# EAGLE board DiscoveryConnector_V1_1 (EAGLE 9.6.2)
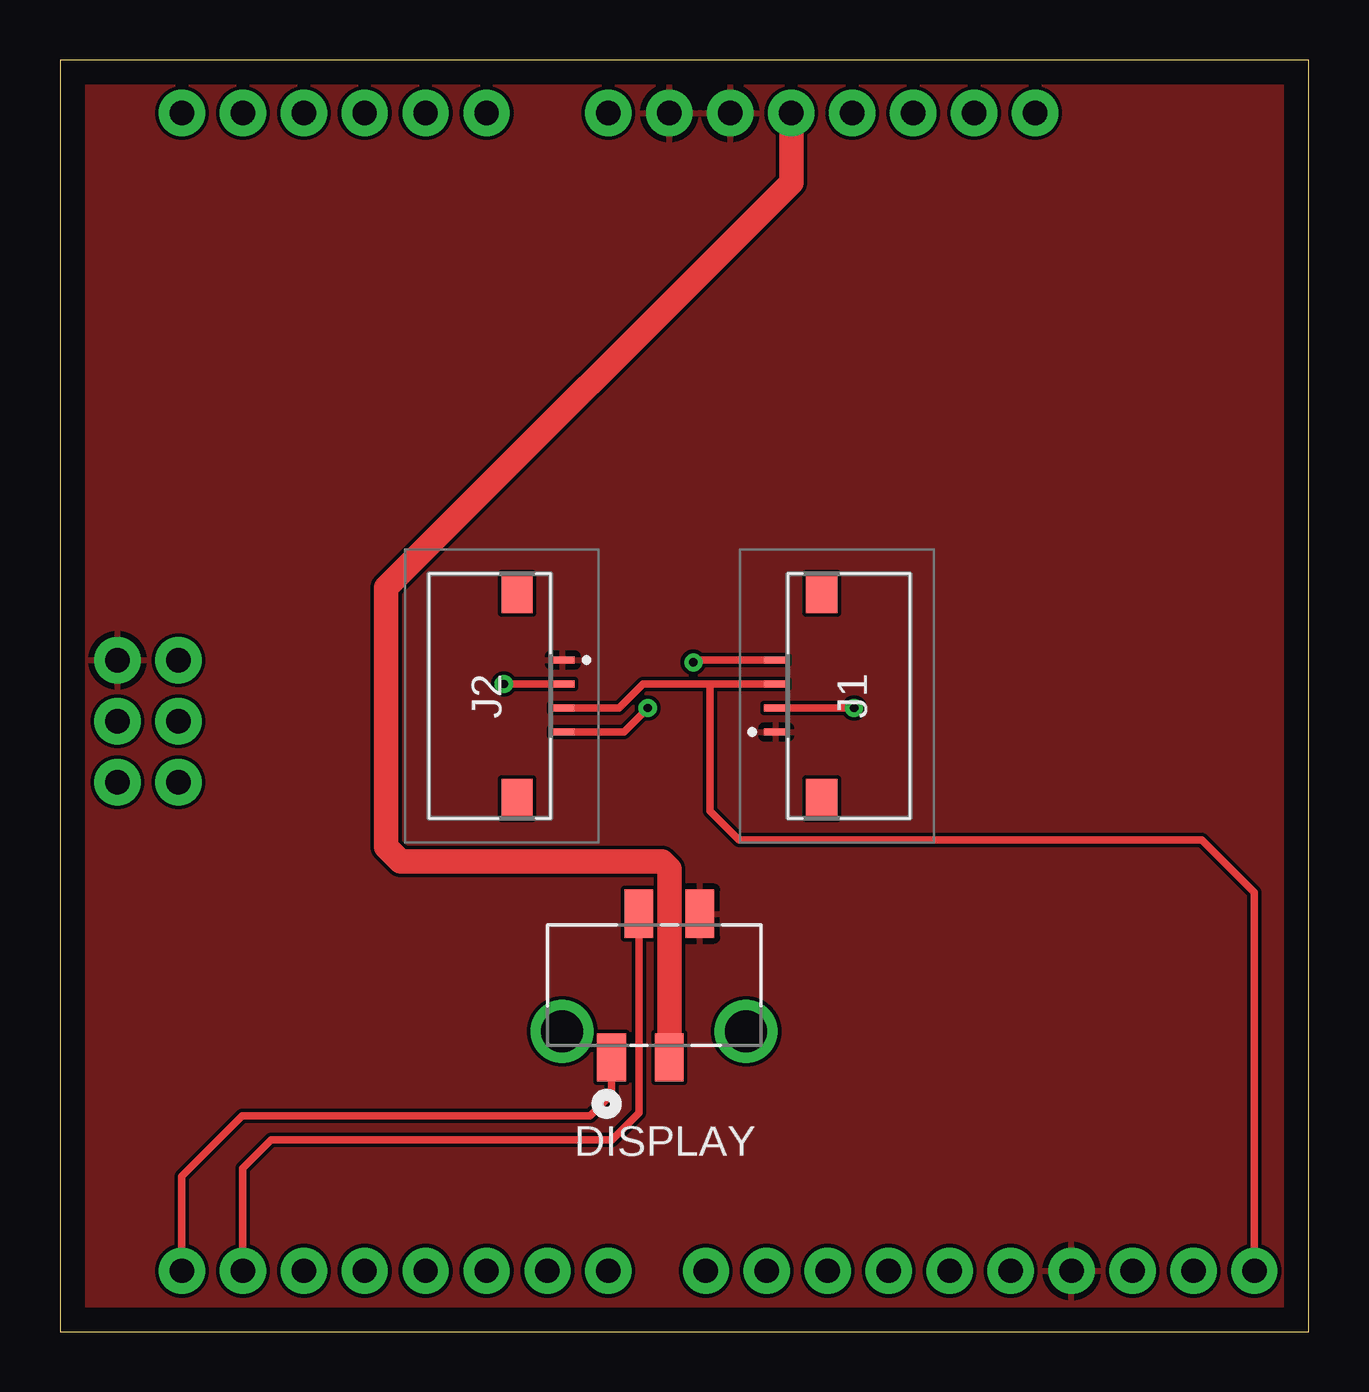
[diagram p0: board, top side]
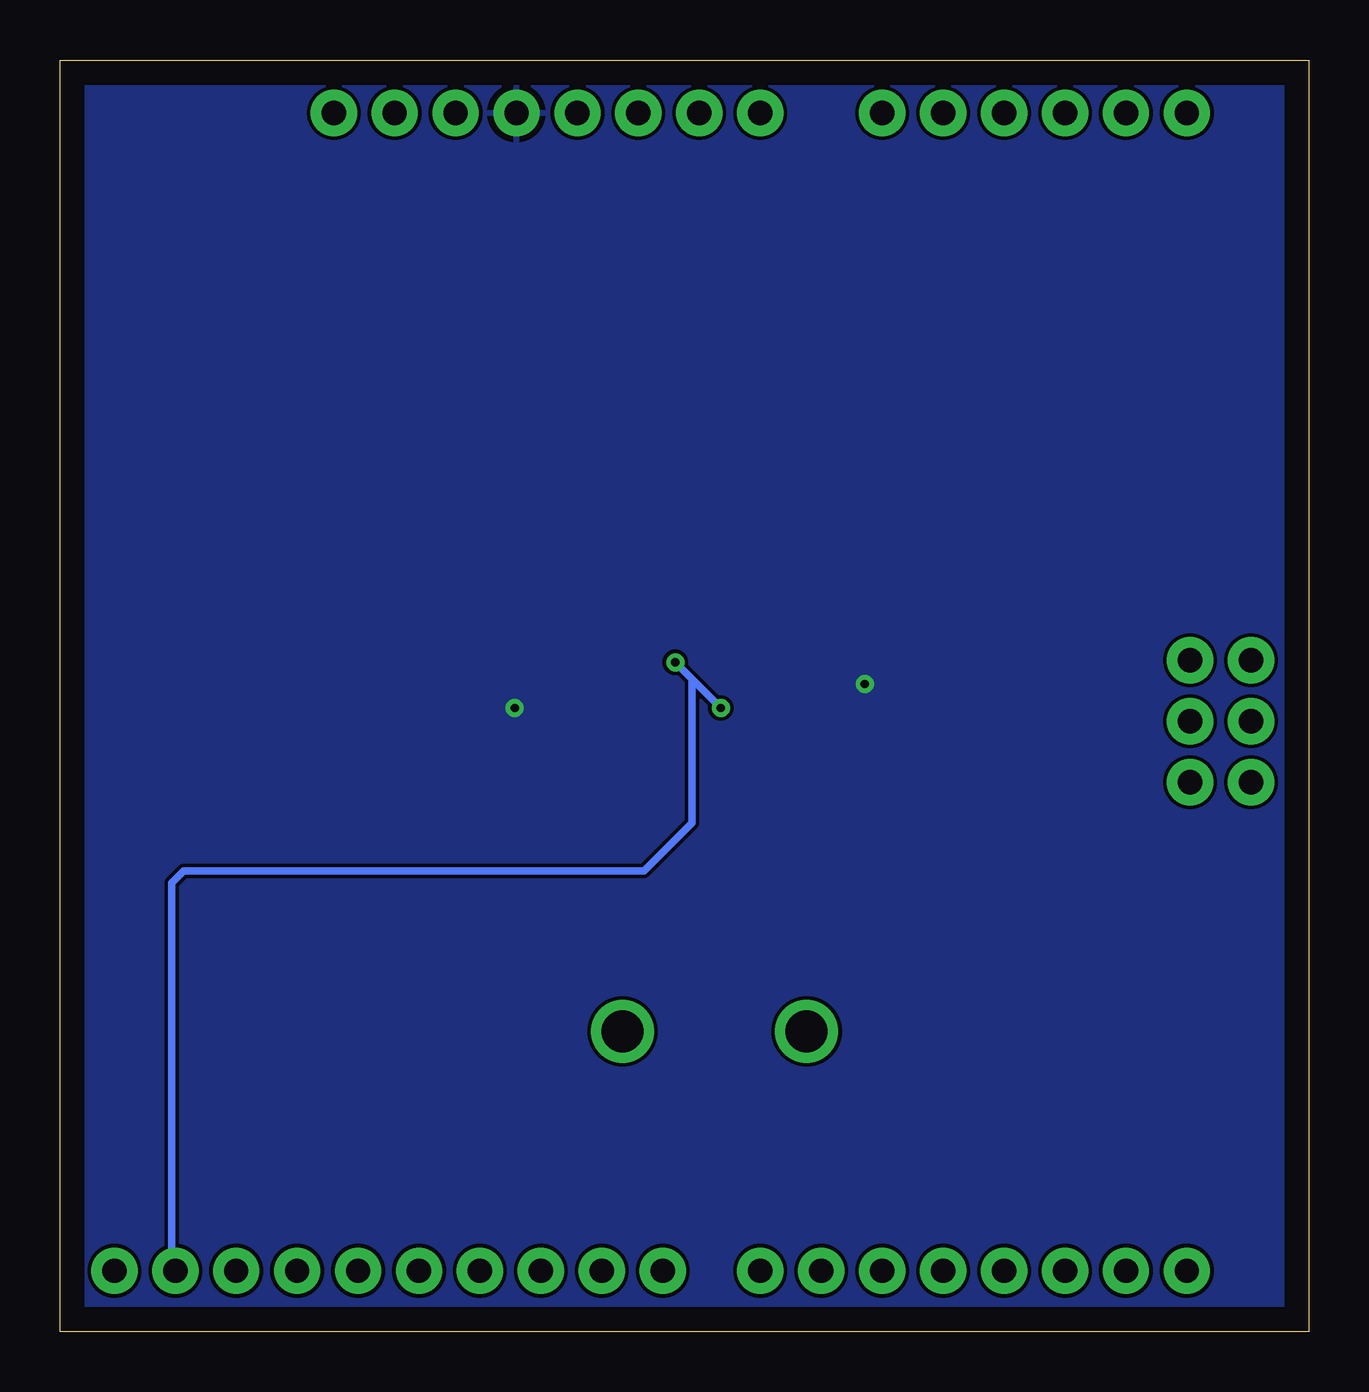
[diagram p1: board, bottom side, seen from below]

Size 52.05 x 53.01 mm. Coordinates in mm from the lower left corner, seen from the top.
Outline: 0,0 52.05,0 52.05,53.01 0,53.01 0,0
Copper layers (1*16): Top 0.035mm / dielectric 1.5mm / Bottom 0.035mm
Design rules "default *": minimum track width 6mil, minimum drill 0.35mm, track to track 6mil, track to pad 6mil, pad to pad 5mil, via to via 6mil, smd to smd 6mil, copper to edge 40mil, drill to drill 6mil, minimum pad ring 10mil, minimum via ring 8mil, stop-mask expansion 4mil, vias tented up to drill 0mil, thermal gap 10mil

## Footprints (pad centres in the part's own frame; a part is rotated, then mirrored left to right if it is on the bottom)
ARDUINO_R3 = drill 1.016 pad 1.93: 3.3V 2.54,-24.13; 5V 5.08,-24.13; A0 17.78,-24.13; A1 20.32,-24.13; A2 22.86,-24.13; A3 25.4,-24.13; A4 27.94,-24.13; A5 30.48,-24.13; AREF -9.144,24.13; D0 30.48,24.13; D1 27.94,24.13; D2 25.4,24.13; D3 22.86,24.13; D4 20.32,24.13; D5 17.78,24.13; D6 15.24,24.13; D7 12.7,24.13; D8 8.636,24.13; D9 6.096,24.13; D10 3.556,24.13; D11 1.016,24.13; D12 -1.524,24.13; D13 -4.064,24.13; GND@1 7.62,-24.13; GND@2 10.16,-24.13; GND@3 -6.604,24.13; GND@4 33.16,-1.32; IOREF -2.54,-24.13; MISO 30.62,3.76; MOSI 33.16,1.22; NC -5.08,-24.13; RESET@1 0,-24.13; RESET@2 30.62,-1.32; SCK 30.62,1.22; SCL -14.224,24.13; SDA -11.684,24.13; VCC 33.16,3.76; VIN 12.7,-24.13
MOLEX_90814-0204 = smd 1.194 x 2.007: 1 0.127,0; 2 1.27,5.994; 3 2.54,0; 4 3.81,5.994 | drill 1.753 pad 2.629: 5 -1.93,1.092; 6 5.74,1.092
686104183422 = smd 0.3 x 1: 1 -1.5,1.9; 2 -0.5,1.9; 3 0.5,1.9; 4 1.5,1.9 | smd 1.65 x 1.3: 5 -4.275,0; 6 4.275,0

## Placement (x,y rotation side)
B1  ARDUINO_UNO_R3  [ARDUINO_R3]  35.56,26.67 180 top
DISPLAY  90814-0204  [MOLEX_90814-0204]  22.86,11.43 0 top
J1  686104183422  [686104183422]  31.75,26.5 90 top
J2  686104183422  [686104183422]  19.05,26.5 270 top

## Library data of the parts
B1 = electro_mechanical
DISPLAY = electro_mechanical; DESCRIPTION: CONN HEADER 4POS 1.27MM SMD TIN; HEIGHT: mm; MANUFACTURER_NAME: Molex; MANUFACTURER_PART_NUMBER: 90814-0204; MOUSER_PART_NUMBER: 538-90814-0204; MOUSER_PRICE-STOCK: https://www.mouser.com/Search/Refine.aspx?Keyword=538-90814-0204
J1 J2 = electro_mechanical; DESCRIPTION: Wurth Elektronik WR-FPC Series 1mm Pitch 4 Way Horizontal SMT Female FPC Connector, Top Contact; HEIGHT: 1.3mm; MANUFACTURER_NAME: Wurth Elektronik; MANUFACTURER_PART_NUMBER: 686104183422; MOUSER_PART_NUMBER: 710-686104183422; MOUSER_PRICE-STOCK: https://www.mouser.com/Search/Refine.aspx?Keyword=710-686104183422

## Nets
3V3: B1.3.3V J1.2 J2.2
GND: B1.GND@1 B1.GND@2 B1.GND@3 B1.GND@4 DISPLAY.4 J1.1 J2.1
N$1: B1.5V DISPLAY.3
SCL: B1.SCL J1.3 J2.3
SDA: B1.SDA J1.4 J2.4
USART6_RX: B1.D1 DISPLAY.2
USART6_TX: B1.D0 DISPLAY.1

## Tracks (layer width: path | path; a pad name or v marks a point on that pad's centre or on a via)
3V3  (via drill 0.35)
  Top 0.305: J2.2 v18.5,27 | J1.2 v33.1,26
  pour Bottom: -1.67,53.34 -1.67,-1.27 53.34,-1.27 53.34,53.34
GND
  pour Top: -1.27,53.34 -1.27,-1.27 53.34,-1.27 53.34,53.34
N$1
  Top 1.016: B1.5V 30.48,47.9 13.6,31.02 13.6,20.2 14.2,19.6 25.1,19.6 25.4,19.3 DISPLAY.3
SCL
  Top 0.305: J1.3 27.1,27 | 27.1,27 24.3,27 23.3,26 J2.3 | 27.1,27 27.1,21.7 28.3,20.5 47.6,20.5 49.78,18.32 B1.SCL
SDA  (via drill 0.35)
  Top 0.305: J2.4 23.5,25 v24.5,26 | v26.4,27.9 26.5,28 J1.4
  Bottom 0.305: v24.5,26 v26.4,27.9 25.7,27.2 25.7,21.2 27.7,19.2 46.9,19.2 47.4,18.7 47.4,2.7 B1.SDA
USART6_RX
  Top 0.305: DISPLAY.2 24.13,9.13 23,8 8.8,8 7.62,6.82 B1.D1
USART6_TX
  Top 0.305: DISPLAY.1 22.99,9.89 22.1,9 7.6,9 5.08,6.48 B1.D0